# Altium PCB interface_board_1u.PcbDoc
Units mil, origin at the board's own origin, x right, y up, seen from the top; angles counter-clockwise.
Board outline 3858 x 3858 mil, 2 copper layers (Top Layer, Bottom Layer); 7 components, 20 nets, 68 pads, 2 vias.
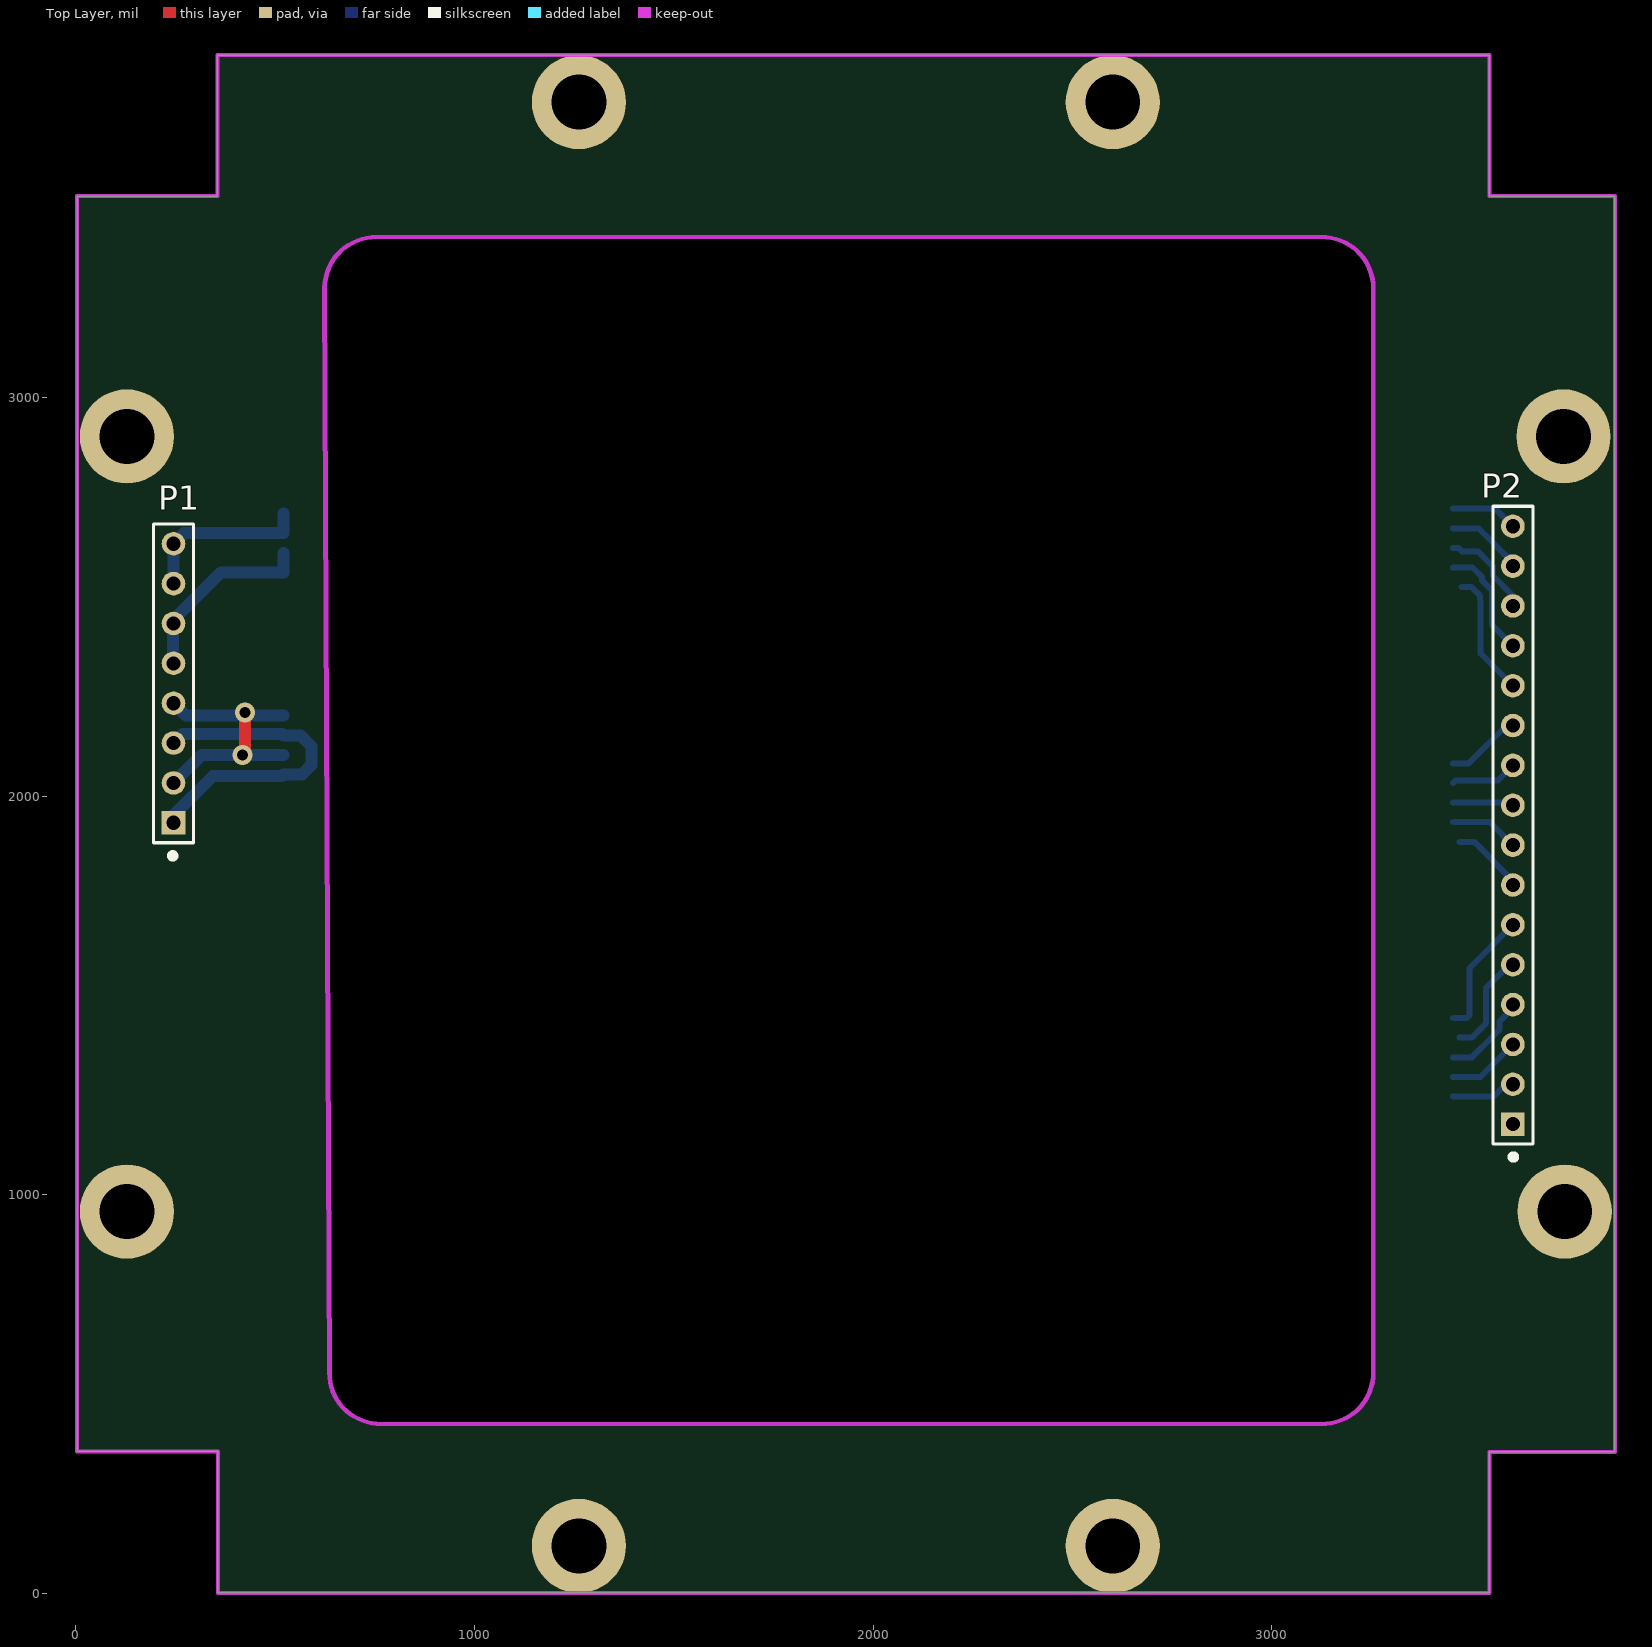
[diagram p0: Top Layer view]
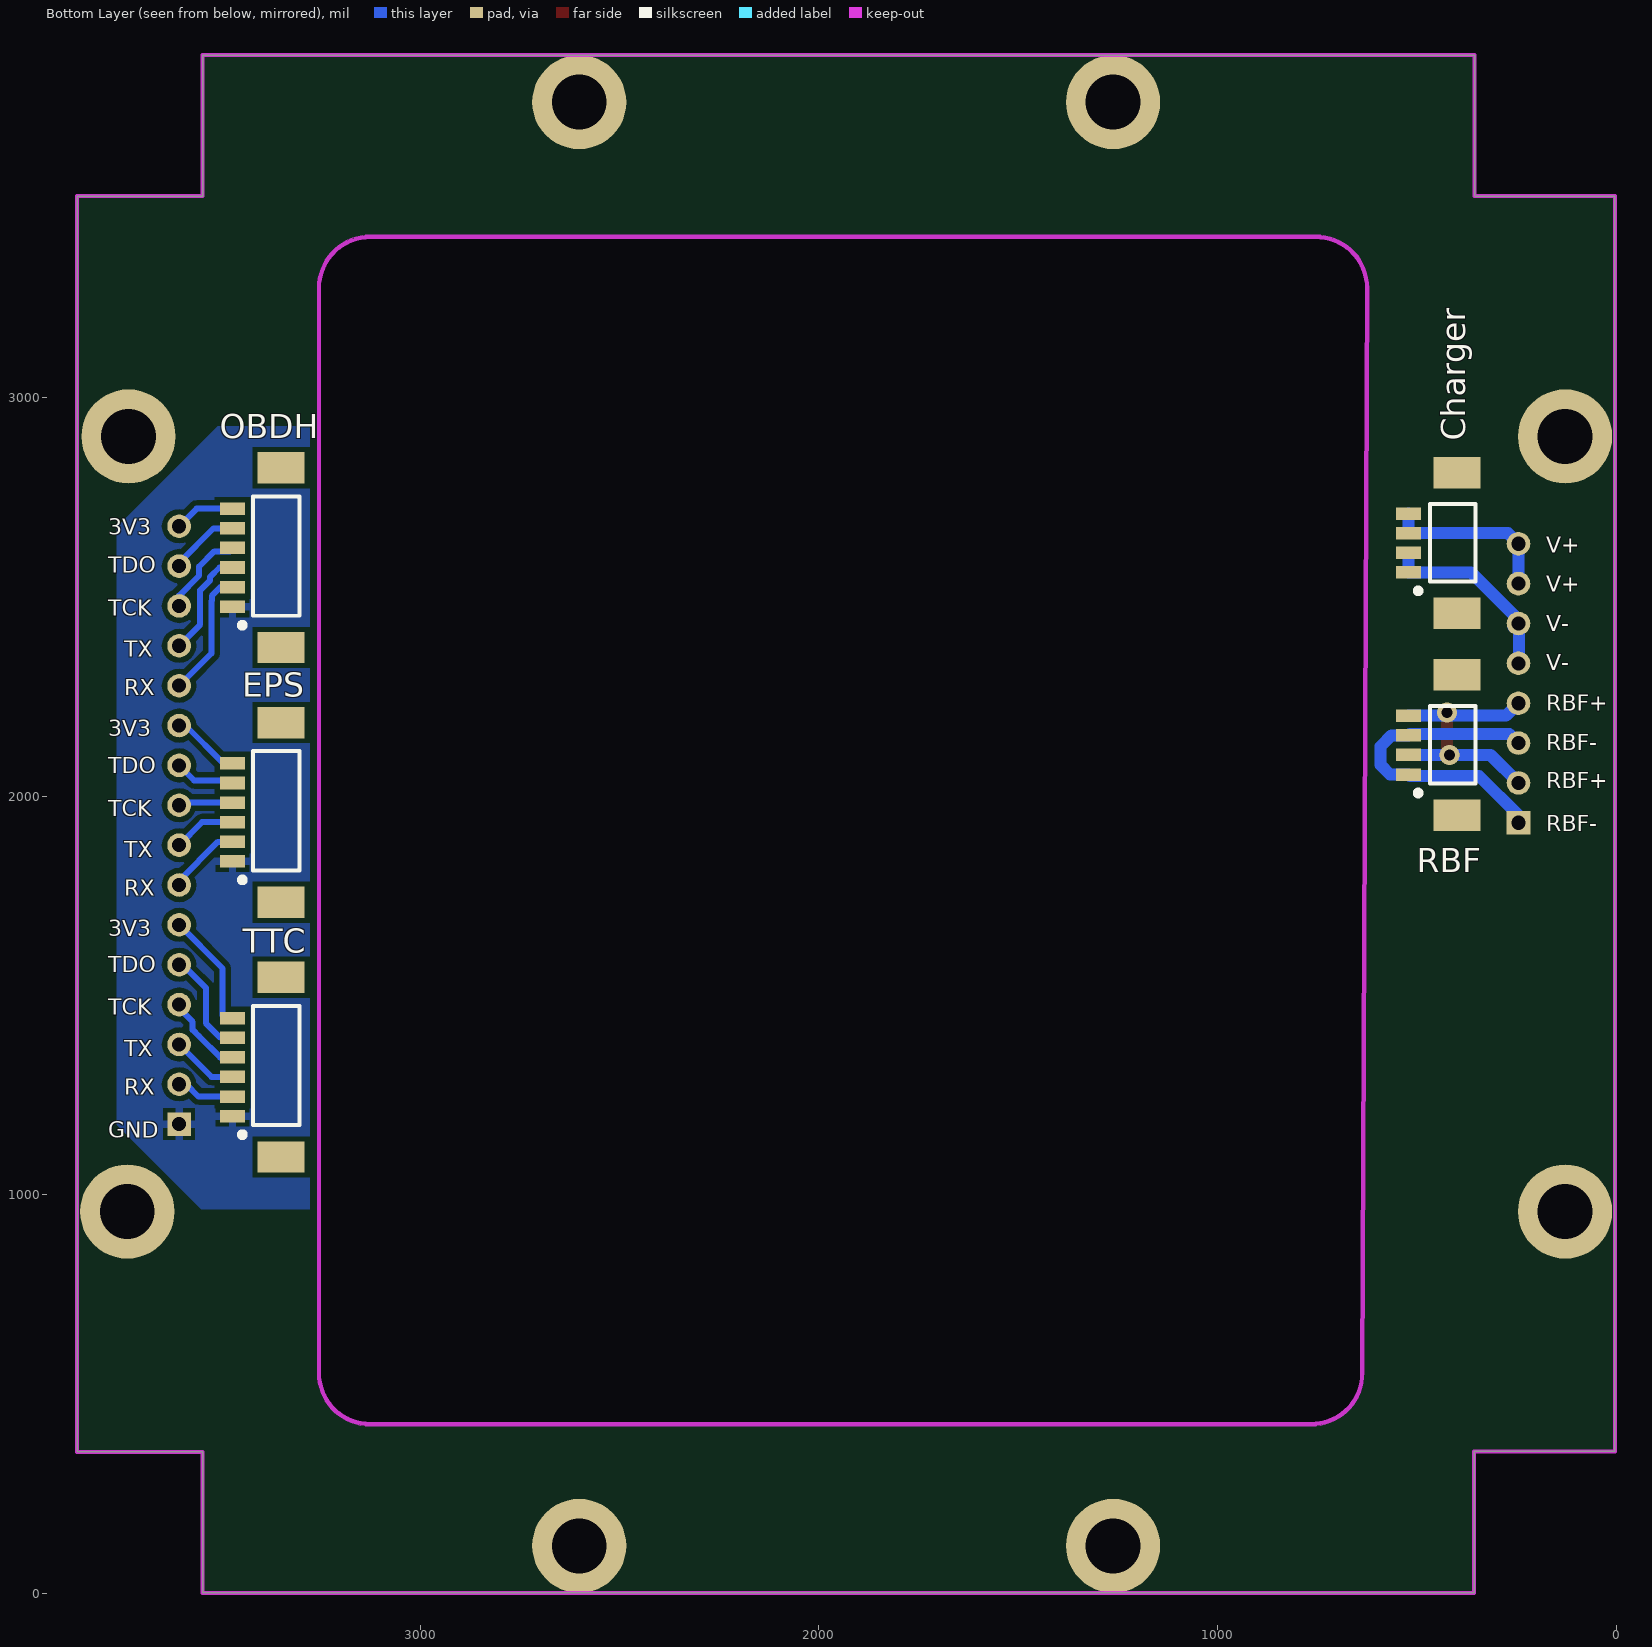
[diagram p1: Bottom Layer view, seen from below]
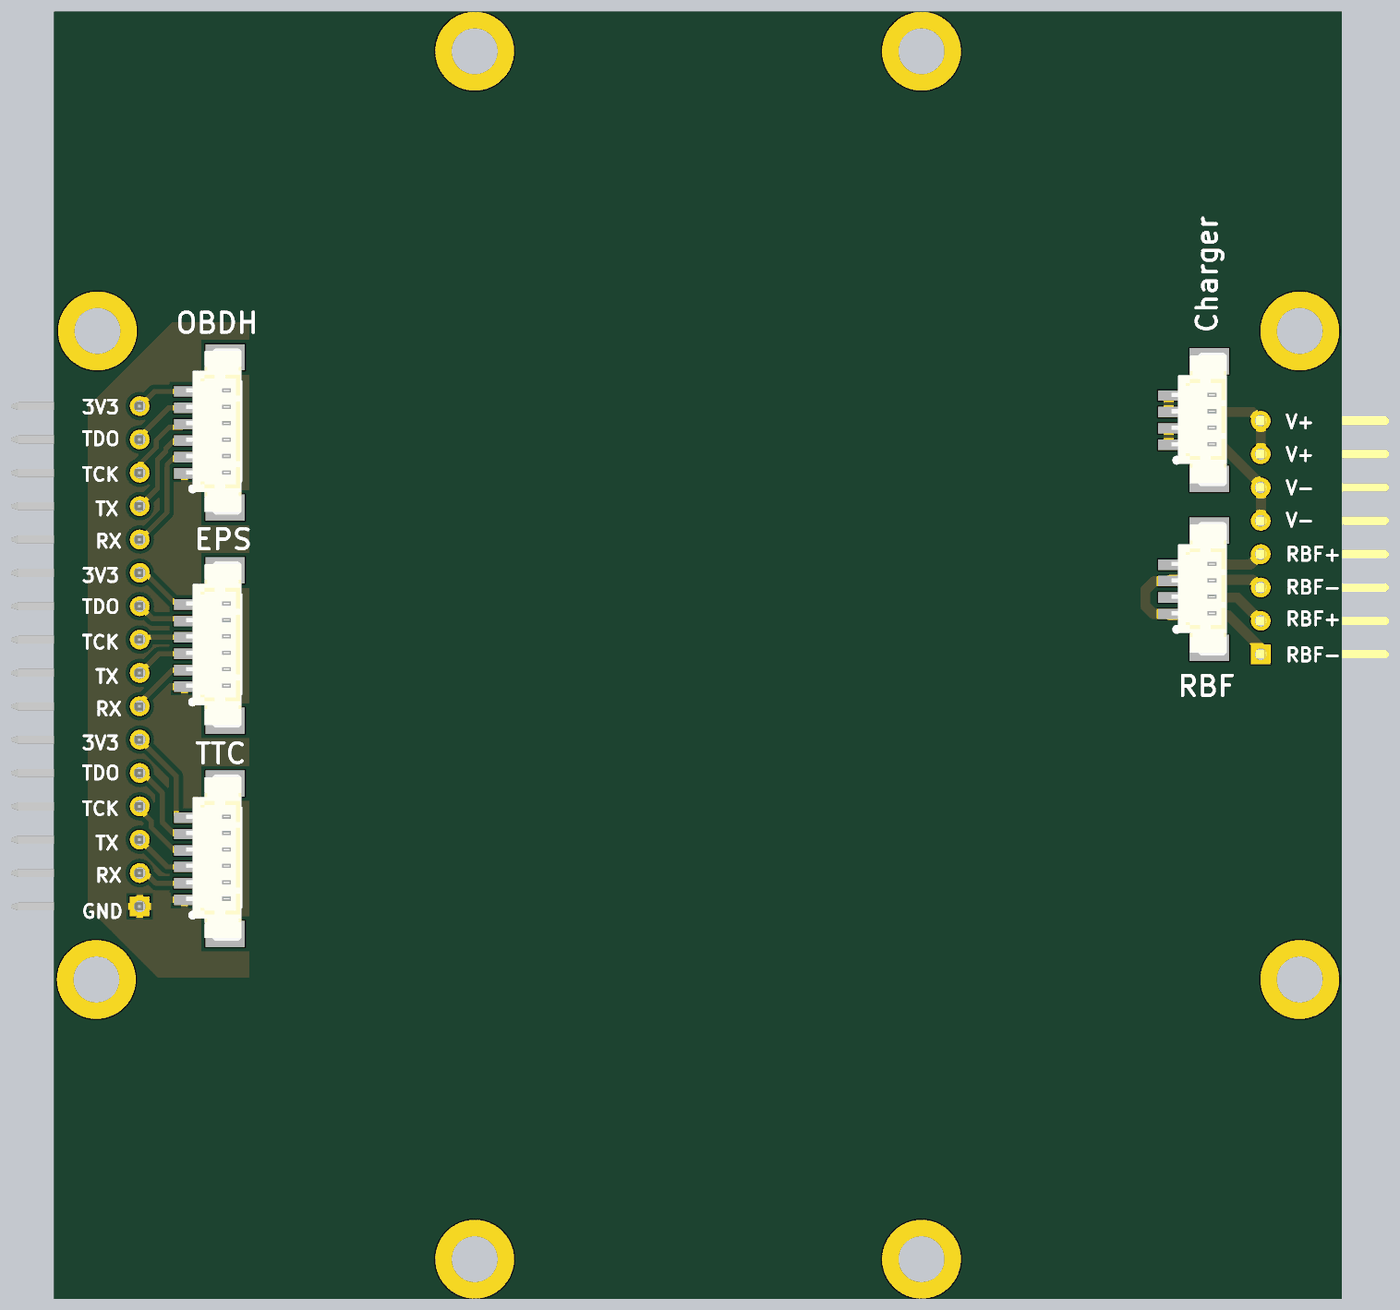
[diagram p2: 3D render of the assembled board from below, using the file's embedded part models]

## Layer stack, top to bottom
Top Solder: solder mask 0.4, Solder Resist, Dk 3.5
Top Layer: signal copper 1.4
Dielectric 1: dielectric 12.6, FR-4, Dk 4.8
Bottom Layer: signal copper 1.4
Bottom Solder: solder mask 0.4, Solder Resist, Dk 3.5

## Board outline
3,356 356,356 356,1 3546,1 3546,354 3547,355 3861,355 3861,3505 3546,3505 3546,3859 355,3859 355,3505 3,3505
cut-out: 631.99,552.98 631.99,553.02 619.71,3273.98 cw(c624.73,3274) 620,3275.66 cw(c753,3274) 753,3407.02 3126,3407.02 cw(c3126,3274) 3259.02,3274 cw(c3254,3274) 3258.79,3272.5 cw(c3254,3271) 3259.01,3271 3259.02,553 cw(c3254,553) 3259.02,552.97 ccw(c3126,553) 3259.02,553 3259.02,552.97 cw(c3126,553) 3126,419.99 767,419.99 cw(c767,425) 766,420.09 cw(c765,425) 765,419.99 cw(c765,553) 631.99,553 cw(c637,553)

## Design rules (kind name [scope] priority, off if disabled: settings)
Clearance [All] p1: gap=13 ignorepadtopadclearanceinfootprint=FALSE except(0: Arc-Hole Track-Hole SMDPad-Hole THPad-Hole Via-Hole Fill-Hole Poly-Hole Region-Hole Text-Hole)
ComponentClearance [All] p1: gap=0 collisioncheckmode=3 verticalgap=100000 showdistances=FALSE
HoleSize [All] p1: absolutevalues=TRUE maxlimit=200 minlimit=1 maxpercent=80.000 minpercent=20.000
MinimumSolderMaskSliver [All] p1: minsoldermaskwidth=0
PlaneConnect [All] p1: planeconnectstyle=Relief reliefexpansion=20 reliefentries=4 reliefconductorwidth=20 reliefairgap=10
PolygonConnect [All] p1: connectstyle=Relief reliefconductorwidth=20 reliefentries=4 polygonreliefangle="90 Angle" airgapwidth=10
RoutingVias [All] p1: holewidth=28 width=50 viastyle="Through Hole" minholewidth=28 minwidth=50 maxholewidth=28 maxwidth=50
SilkToSolderMaskClearance [IsPad] p1: minsilkscreentomaskgap=0 clearancetoexposedcopper=TRUE
SolderMaskExpansion [All] p1: expansion=4
Width [All] p1: maxlimit=30 minlimit=10 preferedwidth=15
25 further rules are at their usual default settings.

## Components (designator, comment, footprint, x,y, rotation, side; value= is the part's Value field where it differs from the comment)
Charger "Header 4_PicoBlade" "HDR4 PicoBlade" 521.32,2561 r90 bottom (schematic designator Charging)
EPS "Header 6H_PicoBlade" "HDR6 PicoBlade" 3471,1836 r90 bottom
OBDH "Header 6H_PicoBlade" "HDR6 PicoBlade" 3471,2475 r90 bottom
P1 "Header 8" HDR1X8 245,1933 r90 top
P2 "Header 16" HDR1X16 3605,1177 r90 top
RBF "Header 4_PicoBlade" "HDR4 PicoBlade" 521.32,2054 r90 bottom
TTC "Header 6H_PicoBlade" "HDR6 PicoBlade" 3471,1197 r90 bottom

## Footprints (in the part's own frame and the unit in brackets; to place one, negate y for a bottom-side part, rotate by r counter-clockwise, add the part's x,y. Pads: shape width x height; smd on the part's side, far side on the other; paste and mask are expansions set on the pad)
HDR1X8 [mm] "Connector; Header; 8 Position"
  rect 1.5x1.5 hole 0.9: 1(0,0)
  round 1.5 hole 0.9: 2(2.54,0) 3(5.08,0) 4(7.62,0) 5(10.16,0) 6(12.7,0) 7(15.24,0) 8(17.78,0)
  silkscreen extent -1.27,-1.27 19.05,1.27, body extent -1.27,-0.38 19.05,9.75, height 2.51
HDR1X16 [mm] "Connector; Header; 16 Position"
  rect 1.5x1.5 hole 0.9: 1(0,0)
  round 1.5 hole 0.9: 2(2.54,0) 3(5.08,0) 4(7.62,0) 5(10.16,0) 6(12.7,0) 7(15.24,0) 8(17.78,0) 9(20.32,0) 10(22.86,0) 11(25.4,0) 12(27.94,0) 13(30.48,0) 14(33.02,0) 15(35.56,0) 16(38.1,0)
  silkscreen extent -1.27,-1.27 39.37,1.27, body extent -1.07,-9.82 39.17,0.27, height 2.51
"HDR4 PicoBlade" [mm]
  rect 2x3 smd: 0(-2.6,-3.1) 0(6.35,-3.1)
  rect 0.8x1.6 smd: 1(0,0) 2(1.25,0) 3(2.5,0) 4(3.75,0)
  silkscreen extent -1.26,-4.28 4.38,-0.54, body extent -3.15,-4.42 7,-0.22, height 4.7
"HDR6 PicoBlade" [mm]
  rect 2x3 smd: 0(-2.6,-3.1) 0(8.85,-3.1)
  rect 0.8x1.6 smd: 1(0,0) 2(1.25,0) 3(2.5,0) 4(3.75,0) 5(5,0) 6(6.25,0)
  silkscreen extent -1.26,-4.28 7.02,-0.54, body extent -3.12,-4.32 9.53,-0.12, height 4.7

## Part data
Charger RBF: "Header, 4-Pin", Partnumber=53398-0471, LatestRevisionDate=17-Jul-2002, LatestRevisionNote="Re-released for DXP Platform.", Publisher="Altium Limited"
EPS OBDH TTC: "Header, 6-Pin, Right Angle", Partnumber=53398-0671, LatestRevisionDate=17-Jul-2002, LatestRevisionNote="Re-released for DXP Platform.", Publisher="Altium Limited"
P1: "Header, 8-Pin", LatestRevisionDate=17-Jul-2002, LatestRevisionNote="Re-released for DXP Platform.", Publisher="Altium Limited"
P2: "Header, 16-Pin", LatestRevisionDate=17-Jul-2002, LatestRevisionNote="Re-released for DXP Platform.", Publisher="Altium Limited"

## Free pads (board coordinates)
  round 236.22 hole 137.8: 0(2601.15,119.11) 1(2601.15,3740.88) 2(128,957.69) 2(128,2902.3) 2(1261.86,119.11) 2(3731.86,2902.3) 2(3735.01,957.69) 3(1261.86,3740.88)

## Via types
v1: diameter 50, hole 28, Top Layer to Bottom Layer, 2 vias

## Nets (pads, with @x,y where several pads share a name; then routed paths per layer and width w, separated by ;. In a path a pad name is that pad's centre, name@x,y a point inside that pad or via, vN(x,y) a via of type N, cw(c..) or ccw(c..) an arc to the next point about the centre after c; other vN are vias at no path point)
3V3_MCU_EPS: EPS.6 P2.11 | length 189.3
  Bottom Layer w15: EPS.6@3455,2082.06 EPS.6 3494.06,2082.06 3589,2177 P2.11
3V3_MCU_OBDH: OBDH.6 P2.16 | length 168.3
  Bottom Layer w15: OBDH.6@3455,2721.06 3560.94,2721.06 P2.16
3V3_MCU_TTC: P2.6 TTC.6 | length 316
  Bottom Layer w15: TTC.6@3455,1443.06 TTC.6 3489.06,1443.06 3496,1450 3496,1568 P2.6
+RBF: P1.2 P1.4 RBF.2 RBF.4 | length 707
  Top Layer w30: v1(418,2103.21) 424,2109.21 v1(424,2210)
  Bottom Layer w30: P1.4@242,2233 P1.4 276.36,2201.64 RBF.4 ; P1.2 315.21,2103.21 v1(418,2103.21) RBF.2
-RBF: P1.1 P1.3 RBF.1 RBF.3 | length 832.5
  Bottom Layer w30: P1.1 245,1951.64 343.57,2050.21 517.53,2050.21 RBF.1 567,2054 591,2078 591,2125 563.57,2152.43 RBF.3 517.53,2156.21 268.21,2156.21 P1.3
GND: EPS.1 OBDH.1 P2.1 TTC.1
PGND: Charger.1 Charger.2 P1.5 P1.6 | length 497.1
  Bottom Layer w30: P1.5@244,2324 244,2424 P1.6@257,2424 ; P1.6 245,2442.39 363.61,2561 Charger.1 Charger.2
RST_EPS: EPS.4 P2.9 | length 152.7
  Bottom Layer w15: EPS.4@3455,1983.64 3598.36,1983.64 P2.9
RST_OBDH: OBDH.4 P2.14 | length 238.8
  Bottom Layer w15: OBDH.4@3455,2622.64 3468.36,2622.64 3477,2614 3516.53,2614 3554.97,2575.55 3554.97,2553.03 3605,2503 P2.14
RST_TTC: P2.4 TTC.4 | length 221.2
  Bottom Layer w15: TTC.4@3455,1344.64 TTC.4 3501.89,1344.64 3554.97,1397.72 3571,1413.75 3571,1433.61 3606.3,1468.91 P2.4@3606.3,1475.7
TEST_EPS: EPS.5 P2.10 | length 168.3
  Bottom Layer w15: EPS.5@3455,2032.85 3461.15,2039 3567,2039 P2.10
TEST_OBDH: OBDH.5 P2.15 | length 194.3
  Bottom Layer w15: OBDH.5@3455,2671.85 3518.68,2671.85 3605,2585.53 P2.15
TEST_TCC: P2.5 TTC.5 | length 261.8
  Bottom Layer w15: TTC.5 3501.52,1393.85 3538,1430.33 3538,1519 3596,1577 P2.5
UART_DEBUG_RX_EPS: EPS.2 P2.7 | length 185.3
  Bottom Layer w15: EPS.2 3507.79,1885.21 3605,1788 P2.7
UART_DEBUG_RX_OBDH: OBDH.2 P2.12 | length 324.4
  Bottom Layer w15: OBDH.2@3475.79,2524.21 3501.31,2524.21 3523,2502.53 3523,2491 3524,2490 3524,2357.69 3590.07,2291.63 P2.12@3619.63,2291.63
UART_DEBUG_RX_TTC: P2.2 TTC.2 | length 162.8
  Bottom Layer w15: TTC.2@3455,1246.21 3556.21,1246.21 3587,1277 P2.2
UART_DEBUG_TX_EPS: EPS.3 P2.8 | length 173.8
  Bottom Layer w15: EPS.3@3455,1934.43 3547.57,1934.43 P2.8
UART_DEBUG_TX_OBDH: OBDH.3 P2.13 | length 302.3
  Bottom Layer w15: OBDH.3@3455,2573.43 OBDH.3 3503.57,2573.43 3526.97,2550.03 3526.97,2541.43 3552,2516.4 3552,2430 P2.13 ; P2.13@3604.37,2391.63 P2.13@3619.63,2391.63
UART_DEBUG_TX_TTC: P2.3 TTC.3 | length 188.7
  Bottom Layer w15: TTC.3@3455,1295.43 3523.43,1295.43 P2.3
  Bottom Layer w20: P2.3@3615.5,1360.5 P2.3@3619,1364
V_CHARGING_BATTERIES: Charger.3 Charger.4 P1.7 P1.8 | length 436.5
  Bottom Layer w30: P1.7 P1.8 271.43,2659.43 Charger.3 Charger.4
pads on no net: Charger.0 EPS.0 OBDH.0 RBF.0 TTC.0

## Polygon pours and split planes (outlines as drawn)
GND on Bottom Layer "gnd" (solid, pour order 4): 3277,963 3549,963 3761,1175 3761,2497 3761,2675 3508,2928 3277,2928

## Keep-outs
Keep-Out Layer:
  lines w10: 624.73,3274 637,553 ccw(c765,553) 765,425 ; 625,3274 cw(c753,3274) 753,3402 3126,3402 cw(c3126,3274) 3254,3274 ; 767,425 3126,425 ccw(c3126,553) 3254,553 3254,3271 ; 3,356 356,356 356,1 3546,1 3546,354 3547,355 3861,355 3861,3477 3861,3505 3546,3505 3546,3859 385,3859 355,3859 355,3794 355,3505 3,3505 3,356

## Silkscreen, mask and mechanical layers (free items; w line width, h text height)
Top Overlay:
  circle w19.68: c3606,1094.64 r4.47
  circle w19.68: c243,1850 r4.47
Bottom Overlay:
  text "3V3" at 3783,2655 h40
  text "V+" at 175,2611 h40
  text "TDO" at 3783,2560 h40
  text "V+" at 175,2513 h40
  text "TCK" at 3783,2453 h40
  text "V-" at 175,2413 h40
  text "TX" at 3743.01,2350 h40
  text "V-" at 175,2316 h40
  text "RX" at 3743.01,2253 h40
  text "RBF+" at 175,2214 h40
  text "3V3" at 3783,2150 h40
  text "RBF-" at 175,2115 h40
  text "TDO" at 3783,2057 h40
  text "RBF+" at 175,2020 h40
  text "TCK" at 3783,1950 h40
  text "RBF-" at 175,1912 h40
  text "TX" at 3743.01,1847 h40
  text "RX" at 3743.01,1750 h40
  text "3V3" at 3783,1648 h40
  text "TDO" at 3783,1558 h40
  text "TCK" at 3783,1451 h40
  text "TX" at 3743.01,1348 h40
  text "RX" at 3743.01,1251 h40
  text "GND" at 3783,1143 h40